# Altium PCB PCB1.PcbDoc (part 2 of 2)
Units mm, origin at the board's own origin, x right, y up, seen from the top; angles counter-clockwise.
Board outline 150 x 80 mm, 2 copper layers (Top Layer, Bottom Layer), stack 1.571 mm thick; 176 components, 104 nets, 518 pads, 47 vias.
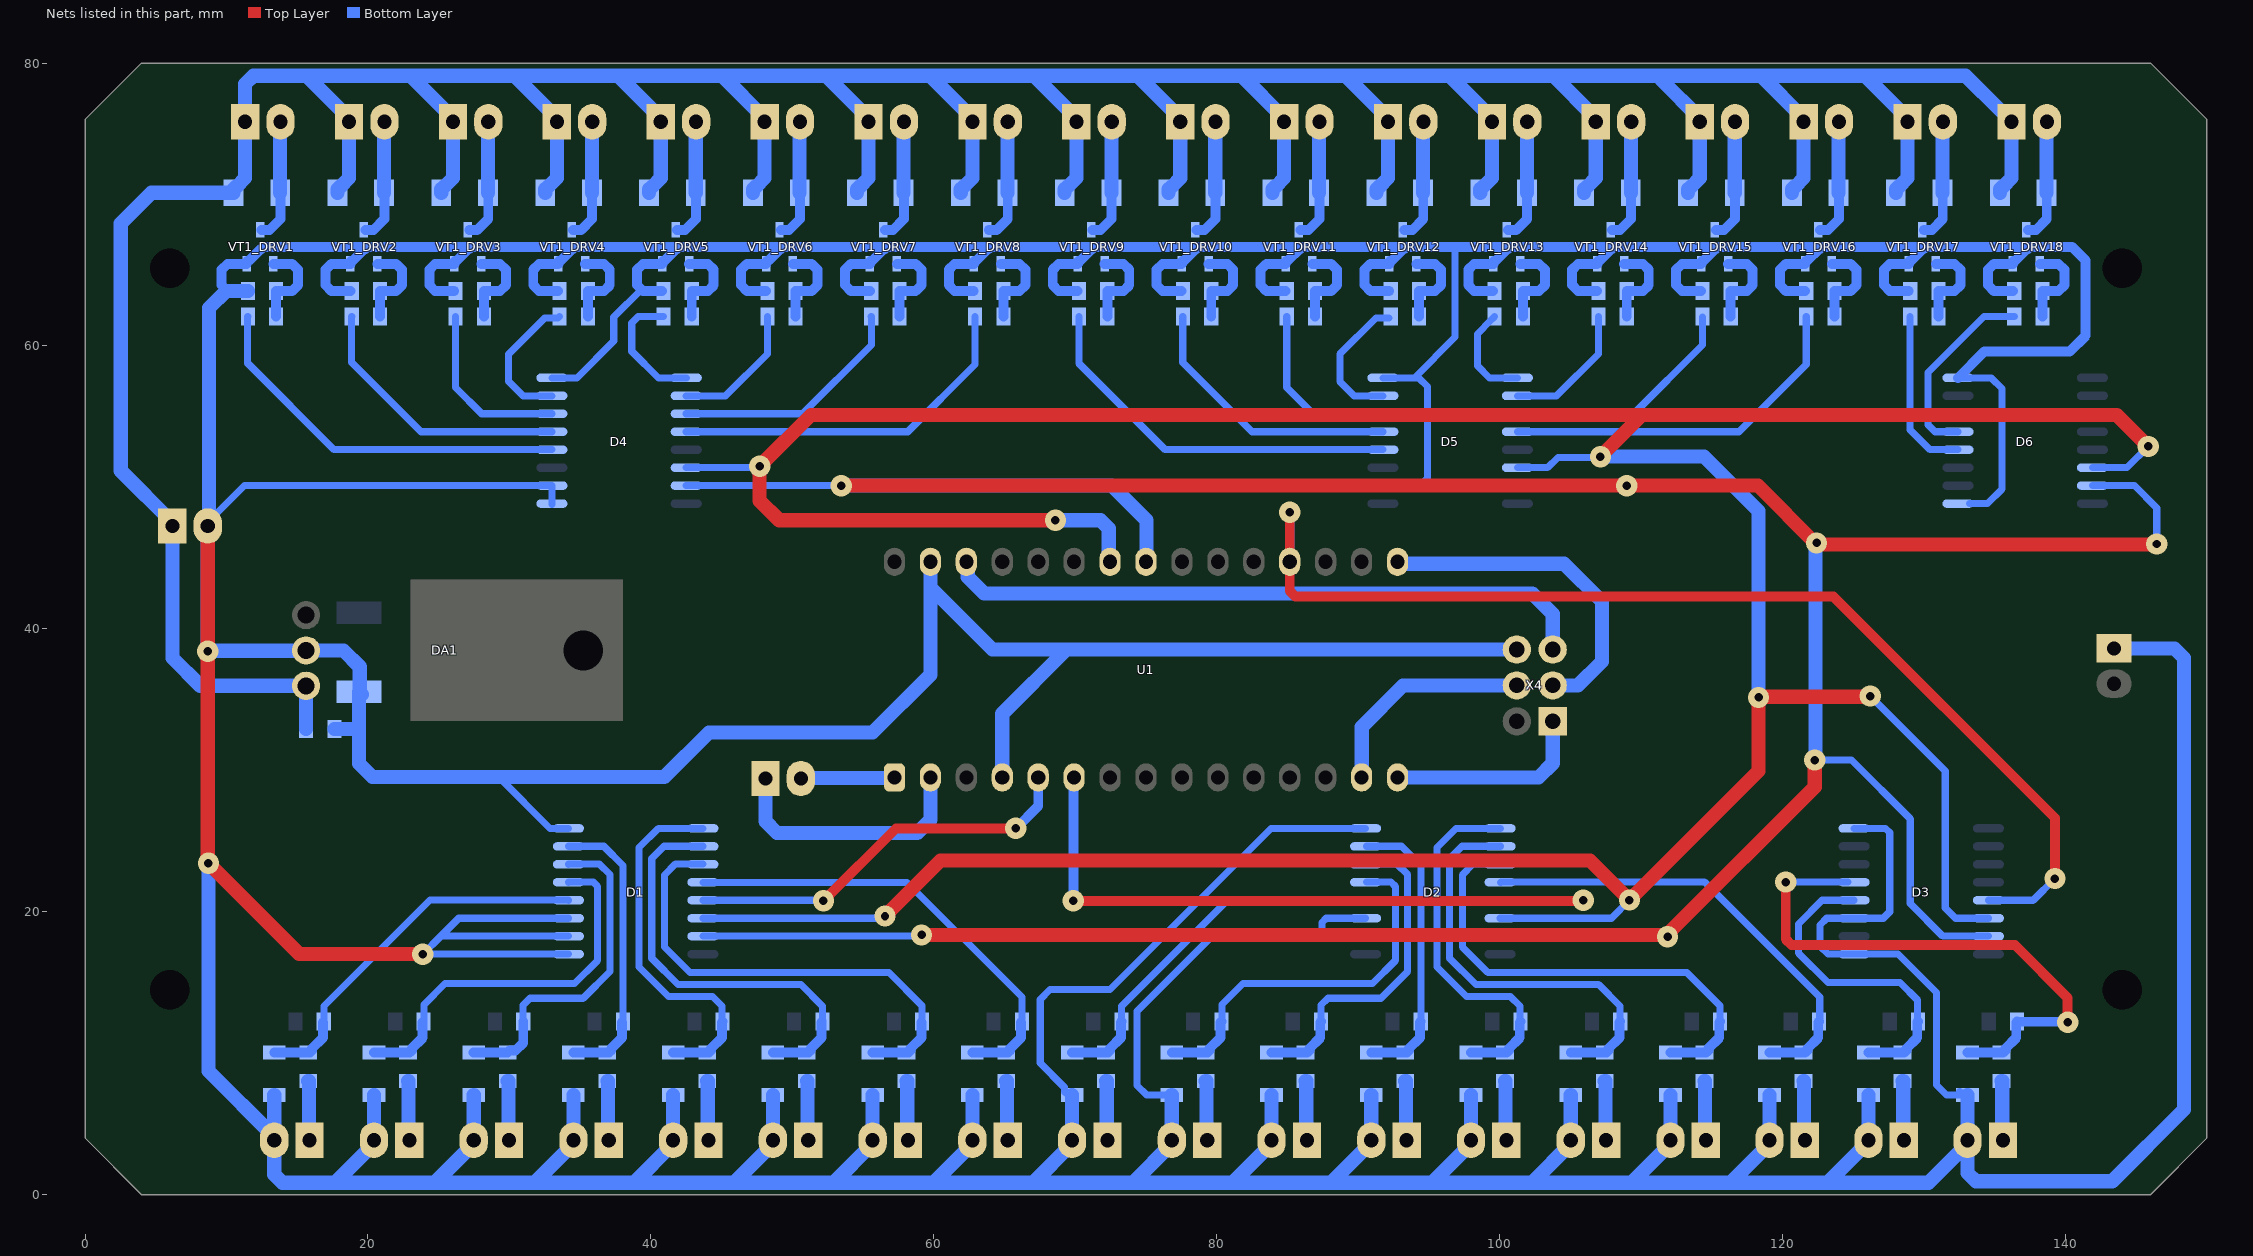
[diagram p2: the nets of this part, all layers, seen from the top]

## Via types
v1: diameter 1.5, hole 0.6, Top Layer to Bottom Layer, 47 vias

## Nets (pads, with @x,y where several pads share a name; then routed paths per layer and width w, separated by ;. In a path a pad name is that pad's centre, name@x,y a point inside that pad or via, vN(x,y) a via of type N, cw(c..) or ccw(c..) an arc to the next point about the centre after c; other vN are vias at no path point) (continued)
+12В: C1.2 DA1.1 VD1_DRV1.2 VD1_DRV2.2 VD1_DRV3.2 VD1_DRV4.2 VD1_DRV5.2 VD1_DRV6.2 VD1_DRV7.2 VD1_DRV8.2 VD1_DRV9.2 VD1_DRV10.2 VD1_DRV11.2 VD1_DRV12.2 VD1_DRV13.2 VD1_DRV14.2 VD1_DRV15.2 VD1_DRV16.2 VD1_DRV17.2 VD1_DRV18.2 X1.1 X1_DRV1.1 X1_DRV2.1 X1_DRV3.1 X1_DRV4.1 X1_DRV5.1 X1_DRV6.1 X1_DRV7.1 X1_DRV8.1 X1_DRV9.1 X1_DRV10.1 X1_DRV11.1 X1_DRV12.1 X1_DRV13.1 X1_DRV14.1 X1_DRV15.1 X1_DRV16.1 X1_DRV17.1 X1_DRV18.1 | length 352.4
  Bottom Layer w1: C1.2@15.625,32.925 DA1.1@15.625,35.975 8.15,35.975 6.175,37.95 X1.1@6.175,47.275 6.175,47.525 2.525,51.175 2.525,68.65 4.704,70.829 VD1_DRV1.2@10.495,70.829 10.495,71.079 10.695,71.279 10.735,71.279 11.32,71.865 X1_DRV1.1@11.32,75.85 11.32,78.514 11.906,79.1 15.665,79.1 ; VD1_DRV2.2@17.84,70.829 17.84,71.079 18.04,71.279 18.079,71.279 18.665,71.865 X1_DRV2.1@18.665,75.85 18.665,76.1 15.665,79.1 ; VD1_DRV3.2@25.184,70.829 25.184,71.079 25.384,71.279 25.423,71.279 26.009,71.865 X1_DRV3.1@26.009,75.85 26.009,76.1 23.009,79.1 ; VD1_DRV4.2@32.529,70.829 32.529,71.079 32.729,71.279 32.768,71.279 33.354,71.865 X1_DRV4.1@33.354,75.85 33.354,76.1 30.354,79.1 ; VD1_DRV5.2@39.873,70.829 39.873,71.079 40.073,71.279 40.112,71.279 40.698,71.865 X1_DRV5.1@40.698,75.85 40.698,76.1 37.698,79.1 ; VD1_DRV6.2@47.217,70.829 47.217,71.079 47.417,71.279 47.457,71.279 48.042,71.865 X1_DRV6.1@48.042,75.85 48.042,76.1 45.042,79.1 ; VD1_DRV7.2@54.562,70.829 54.562,71.079 54.762,71.279 54.801,71.279 55.387,71.865 X1_DRV7.1@55.387,75.85 55.387,76.1 52.387,79.1 ; VD1_DRV8.2@61.906,70.829 61.906,71.079 62.106,71.279 62.145,71.279 62.731,71.865 X1_DRV8.1@62.731,75.85 62.731,76.1 59.731,79.1 ; VD1_DRV9.2@69.251,70.829 69.251,71.079 69.451,71.279 69.49,71.279 70.076,71.865 X1_DRV9.1@70.076,75.85 70.076,76.1 67.076,79.1 ; VD1_DRV10.2@76.595,70.829 76.595,71.079 76.795,71.279 76.834,71.279 77.42,71.865 X1_DRV10.1@77.42,75.85 77.42,76.1 74.42,79.1 ; VD1_DRV11.2@83.939,70.829 83.939,71.079 84.139,71.279 84.179,71.279 84.764,71.865 X1_DRV11.1@84.764,75.85 84.764,76.1 81.764,79.1 ; VD1_DRV12.2@91.284,70.829 91.284,71.079 91.484,71.279 91.523,71.279 92.109,71.865 X1_DRV12.1@92.109,75.85 92.109,76.1 89.109,79.1 ; VD1_DRV13.2@98.628,70.829 98.628,71.079 98.828,71.279 98.867,71.279 99.453,71.865 X1_DRV13.1@99.453,75.85 99.453,76.1 96.453,79.1 ; VD1_DRV14.2@105.973,70.829 105.973,71.079 106.173,71.279 106.212,71.279 106.798,71.865 X1_DRV14.1@106.798,75.85 106.798,76.1 103.798,79.1 ; VD1_DRV15.2@113.317,70.829 113.317,71.079 113.517,71.279 113.556,71.279 114.142,71.865 X1_DRV15.1@114.142,75.85 114.142,76.1 111.45,78.792 111.45,79.1 ; VD1_DRV16.2@120.661,70.829 120.661,71.079 120.861,71.279 120.901,71.279 121.486,71.865 X1_DRV16.1@121.486,75.85 ; X1_DRV16.1@121.486,75.85 121.486,76.1 118.486,79.1 ; VD1_DRV17.2@128.006,70.829 128.006,71.079 128.206,71.279 128.245,71.279 128.831,71.865 X1_DRV17.1@128.831,75.85 128.831,76.1 125.831,79.1 ; VD1_DRV18.2@135.359,70.829 135.359,71.079 135.559,71.279 135.598,71.279 136.184,71.865 X1_DRV18.1@136.184,75.85 136.184,76.1 135.684,76.6 135.434,76.6 132.934,79.1 125.831,79.1 ; 15.665,79.1 23.009,79.1 ; 23.009,79.1 30.354,79.1 ; 30.354,79.1 37.698,79.1 ; 37.698,79.1 45.042,79.1 ; 45.042,79.1 52.387,79.1 ; 52.387,79.1 59.731,79.1 ; 59.731,79.1 67.076,79.1 ; 67.076,79.1 74.42,79.1 ; 74.42,79.1 81.764,79.1 ; 81.764,79.1 89.109,79.1 ; 89.109,79.1 96.453,79.1 ; 96.453,79.1 103.798,79.1 ; 103.798,79.1 111.45,79.1 ; 111.45,79.1 118.486,79.1 ; 118.486,79.1 125.831,79.1
GND: C1.1 C1_INPUTER1.1 C1_INPUTER2.1 C1_INPUTER3.1 C1_INPUTER4.1 C1_INPUTER5.1 C1_INPUTER6.1 C1_INPUTER7.1 C1_INPUTER8.1 C1_INPUTER9.1 C1_INPUTER10.1 C1_INPUTER11.1 C1_INPUTER12.1 C1_INPUTER13.1 C1_INPUTER14.1 C1_INPUTER15.1 C1_INPUTER16.1 C1_INPUTER17.1 C1_INPUTER18.1 C2.2 D1.1 D1.2 D1.3 D1.8 D2.2 D2.3 D2.8 D3.1 D3.3 D3.8 D4.1 D4.2 D4.8 D5.2 D5.8 D6.1 D6.8 DA1.2 R2_DRV1.2 R2_DRV2.2 R2_DRV3.2 R2_DRV4.2 R2_DRV5.2 R2_DRV6.2 R2_DRV7.2 R2_DRV8.2 R2_DRV9.2 R2_DRV10.2 R2_DRV11.2 R2_DRV12.2 R2_DRV13.2 R2_DRV14.2 R2_DRV15.2 R2_DRV16.2 R2_DRV17.2 R2_DRV18.2 U1.4 U1.29 VT1_DRV1.2 VT1_DRV2.2 VT1_DRV3.2 VT1_DRV4.2 VT1_DRV5.2 VT1_DRV6.2 VT1_DRV7.2 VT1_DRV8.2 VT1_DRV9.2 VT1_DRV10.2 VT1_DRV11.2 VT1_DRV12.2 VT1_DRV13.2 VT1_DRV14.2 VT1_DRV15.2 VT1_DRV16.2 VT1_DRV17.2 VT1_DRV18.2 X1.2 X1_INPUTER1.2 X1_INPUTER2.2 X1_INPUTER3.2 X1_INPUTER4.2 X1_INPUTER5.2 X1_INPUTER6.2 X1_INPUTER7.2 X1_INPUTER8.2 X1_INPUTER9.2 X1_INPUTER10.2 X1_INPUTER11.2 X1_INPUTER12.2 X1_INPUTER13.2 X1_INPUTER14.2 X1_INPUTER15.2 X1_INPUTER16.2 X1_INPUTER17.2 X1_INPUTER18.2 X2.1 X4.6 | length 998.8
  Top Layer w1: v1@8.675,23.425 v1(8.675,38.425) X1.2@8.675,47.275 ; v1(8.723,23.431) 15.149,17.005 v1(23.88,17.005)
  Bottom Layer w0.5: X1.2@8.675,47.275 8.675,47.525 8.775,47.625 11.275,50.125 D4.2@33,50.125 D4.1@33,48.855 D4.1@33,48.809 ; 29.3,29.475 32.88,25.895 D1.8@34.175,25.895 ; D4.8@33,57.745 34.77,57.745 37.375,60.35 37.375,62.043 39.33,63.998 ; D1.1@34.175,17.005 v1(23.88,17.005) 25.15,18.275 ; D1.2@34.175,18.275 25.15,18.275 ; D1.3@34.175,19.545 26.42,19.545 25.15,18.275 ; C1_INPUTER9.1@69.775,7.05 69.475,7.05 69.225,7.3 69.225,7.6 67.525,9.3 67.525,13.8 68.225,14.5 72.45,14.5 83.845,25.895 D2.8@90.525,25.895 ; C1_INPUTER10.1@76.825,7.05 75.05,7.05 74.375,7.725 74.375,12.975 79.675,18.275 87.739,18.275 ; D2.2@90.525,18.275 87.739,18.275 ; D2.3@90.525,19.545 87.739,19.545 87.446,19.252 87.446,18.568 87.739,18.275 ; D5.2@91.75,50.125 94.35,50.125 94.9,50.675 94.9,57.125 94.28,57.745 93.97,57.745 ; D5.8@91.75,57.745 93.97,57.745 ; 97.081,67 96.85,66.769 96.85,60.625 93.97,57.745 ; D3.8@125.05,25.895 127.282,25.895 127.575,25.602 127.575,20 127.12,19.545 D3.3@125.05,19.545 123.12,19.545 122.65,19.075 122.65,17.568 123.2,17.018 125.037,17.018 D3.1@125.05,17.005 128.17,17.005 130.875,14.3 130.875,7.75 131.575,7.05 C1_INPUTER18.1@132.775,7.05 ; D6.8@132.4,57.745 134.755,57.745 135.5,57 135.5,49.874 134.481,48.855 D6.1@133.227,48.855 ; C1_INPUTER18.1@132.525,7.3 C1_INPUTER18.1@132.775,7.05 ; C1_INPUTER18.1@133.075,7.05 C1_INPUTER18.1@132.775,7.05
  Bottom Layer w0.7: 10.06,63.89 9.65,64.3 9.65,65.39 10.06,65.8 VT1_DRV1.2@11.42,65.8 11.47,65.85 11.47,66 11.57,66 12.42,66.85 12.47,66.85 12.62,67 19.965,67 ; R2_DRV2.2@18.612,63.882 R2_DRV2.2@18.754,63.882 ; R2_DRV2.2@18.704,63.89 17.405,63.89 16.995,64.3 16.995,65.39 17.405,65.8 VT1_DRV2.2@18.765,65.8 18.815,65.85 18.815,66 18.915,66 19.765,66.85 19.815,66.85 19.965,67 ; R2_DRV3.2@25.957,63.882 R2_DRV3.2@26.099,63.882 ; R2_DRV3.2@26.049,63.89 24.749,63.89 24.339,64.3 24.339,65.39 24.749,65.8 VT1_DRV3.2@26.109,65.8 26.159,65.85 26.159,66 26.259,66 27.109,66.85 27.159,66.85 27.309,67 ; R2_DRV4.2@33.301,63.882 R2_DRV4.2@33.443,63.882 ; R2_DRV4.2@33.393,63.89 32.094,63.89 31.684,64.3 31.684,65.39 32.094,65.8 VT1_DRV4.2@33.454,65.8 33.504,65.85 33.504,66 33.604,66 34.454,66.85 34.504,66.85 34.654,67 ; R2_DRV5.2@40.646,63.882 R2_DRV5.2@40.788,63.882 ; R2_DRV5.2@40.738,63.89 39.438,63.89 39.33,63.998 39.028,64.3 39.028,65.39 39.438,65.8 VT1_DRV5.2@40.798,65.8 40.848,65.85 40.848,66 40.948,66 41.798,66.85 41.848,66.85 41.998,67 ; R2_DRV6.2@47.99,63.882 R2_DRV6.2@48.132,63.882 ; R2_DRV6.2@48.082,63.89 46.782,63.89 46.372,64.3 46.372,65.39 46.782,65.8 VT1_DRV6.2@48.142,65.8 48.192,65.85 48.192,66 48.292,66 49.142,66.85 49.192,66.85 49.342,67 ; R2_DRV7.2@55.334,63.882 R2_DRV7.2@55.476,63.882 ; R2_DRV7.2@55.426,63.89 54.127,63.89 53.717,64.3 53.717,65.39 54.127,65.8 VT1_DRV7.2@55.487,65.8 55.537,65.85 55.537,66 55.637,66 56.487,66.85 56.537,66.85 56.687,67 ; R2_DRV8.2@62.679,63.882 R2_DRV8.2@62.821,63.882 ; R2_DRV8.2@62.771,63.89 61.471,63.89 61.061,64.3 61.061,65.39 61.471,65.8 VT1_DRV8.2@62.831,65.8 62.881,65.85 62.881,66 62.981,66 63.831,66.85 63.881,66.85 64.031,67 ; R2_DRV9.2@70.023,63.882 R2_DRV9.2@70.165,63.882 ; R2_DRV9.2@70.115,63.89 68.816,63.89 68.406,64.3 68.406,65.39 68.816,65.8 VT1_DRV9.2@70.176,65.8 70.226,65.85 70.226,66 70.326,66 71.176,66.85 71.226,66.85 71.376,67 ; R2_DRV10.2@77.368,63.882 R2_DRV10.2@77.51,63.882 ; R2_DRV10.2@77.46,63.89 76.16,63.89 75.75,64.3 75.75,65.39 76.16,65.8 VT1_DRV10.2@77.52,65.8 77.57,65.85 77.57,66 77.67,66 78.52,66.85 78.57,66.85 78.72,67 ; R2_DRV11.2@84.712,63.882 R2_DRV11.2@84.854,63.882 ; R2_DRV11.2@84.804,63.89 83.504,63.89 83.094,64.3 83.094,65.39 83.504,65.8 VT1_DRV11.2@84.864,65.8 84.914,65.85 84.914,66 85.014,66 85.864,66.85 85.914,66.85 86.064,67 ; R2_DRV12.2@92.056,63.882 R2_DRV12.2@92.198,63.882 ; R2_DRV12.2@92.148,63.89 90.849,63.89 90.439,64.3 90.439,65.39 90.849,65.8 VT1_DRV12.2@92.209,65.8 92.259,65.85 92.259,66 92.359,66 93.209,66.85 93.259,66.85 93.409,67 ; R2_DRV13.2@99.401,63.882 R2_DRV13.2@99.543,63.882 ; R2_DRV13.2@99.493,63.89 98.193,63.89 97.783,64.3 97.783,65.39 98.193,65.8 VT1_DRV13.2@99.553,65.8 99.603,65.85 99.603,66 99.703,66 100.553,66.85 100.603,66.85 100.753,67 ; R2_DRV14.2@106.745,63.882 R2_DRV14.2@106.887,63.882 ; R2_DRV14.2@106.837,63.89 105.538,63.89 105.128,64.3 105.128,65.39 105.538,65.8 VT1_DRV14.2@106.898,65.8 106.948,65.85 106.948,66 107.048,66 107.898,66.85 107.948,66.85 108.098,67 ; R2_DRV15.2@114.09,63.882 R2_DRV15.2@114.232,63.882 ; R2_DRV15.2@114.182,63.89 112.882,63.89 112.472,64.3 112.472,65.39 112.882,65.8 VT1_DRV15.2@114.242,65.8 114.292,65.85 114.292,66 114.392,66 115.242,66.85 115.292,66.85 115.442,67 ; R2_DRV16.2@121.434,63.882 R2_DRV16.2@121.576,63.882 ; R2_DRV16.2@121.526,63.89 120.226,63.89 119.816,64.3 119.816,65.39 120.226,65.8 VT1_DRV16.2@121.586,65.8 121.636,65.85 121.636,66 121.736,66 122.586,66.85 122.636,66.85 122.786,67 ; R2_DRV17.2@128.778,63.882 R2_DRV17.2@128.92,63.882 ; R2_DRV17.2@128.87,63.89 127.571,63.89 127.161,64.3 127.161,65.39 127.571,65.8 VT1_DRV17.2@128.931,65.8 128.981,65.85 128.981,66 129.081,66 129.931,66.85 129.981,66.85 130.131,67 ; D6.8@132.4,57.745 134.255,59.6 140.3,59.6 141.425,60.725 141.425,66.05 140.475,67 137.484,67 ; R2_DRV18.2@136.131,63.882 R2_DRV18.2@136.273,63.882 ; R2_DRV18.2@136.223,63.89 134.924,63.89 134.514,64.3 134.514,65.39 134.924,65.8 VT1_DRV18.2@136.284,65.8 136.334,65.85 136.334,66 136.434,66 137.284,66.85 137.334,66.85 137.484,67 ; 19.965,67 27.309,67 ; 27.309,67 34.654,67 ; 34.654,67 41.998,67 ; 41.998,67 49.342,67 ; 49.342,67 56.687,67 ; 56.687,67 64.031,67 ; 64.031,67 71.376,67 ; 71.376,67 78.72,67 ; 78.72,67 86.064,67 ; 86.064,67 93.409,67 ; 93.409,67 97.081,67 100.753,67 ; 100.753,67 108.098,67 ; 108.098,67 115.442,67 ; 115.442,67 122.786,67 ; 122.786,67 130.131,67 ; 130.131,67 137.484,67
  Bottom Layer w1: v1(8.723,23.431) 8.723,8.752 X1_INPUTER1.2@13.375,4.1 ; R2_DRV1.2@11.268,63.882 9.982,63.882 8.775,62.675 8.775,47.625 8.775,47.375 X1.2@8.675,47.275 v1(8.675,38.425) 8.7,38.45 15.6,38.45 DA1.2@15.625,38.475 18.275,38.475 19.425,37.325 19.425,35.6 C2.2@19.375,35.55 ; R2_DRV1.2@11.41,63.882 R2_DRV1.2@11.51,63.882 ; C1_INPUTER1.1@13.375,7.05 X1_INPUTER1.2@13.375,4.1 ; C1.1@17.625,32.925 19.375,32.925 ; C2.2@19.575,35.35 C2.2@19.375,35.55 ; C1_INPUTER2.1@20.425,7.05 X1_INPUTER2.2@20.425,3.85 20.425,3.6 17.675,0.85 ; C1_INPUTER3.1@27.475,7.05 X1_INPUTER3.2@27.475,3.85 27.475,3.6 24.725,0.85 ; C1_INPUTER4.1@34.525,7.05 X1_INPUTER4.2@34.525,3.85 34.525,3.6 31.775,0.85 ; C1_INPUTER5.1@41.575,7.05 X1_INPUTER5.2@41.575,3.85 41.575,3.6 38.825,0.85 ; C1_INPUTER6.1@48.625,7.05 X1_INPUTER6.2@48.625,3.85 48.625,3.6 45.875,0.85 ; C1_INPUTER7.1@55.675,7.05 X1_INPUTER7.2@55.675,3.85 55.675,3.6 52.925,0.85 ; U1.29@59.76,44.74 59.76,42.935 ; C1_INPUTER8.1@62.725,7.05 X1_INPUTER8.2@62.725,3.85 62.725,3.6 59.975,0.85 ; U1.4@64.84,29.5 64.84,34.005 69.375,38.54 ; C1_INPUTER9.1@69.775,7.05 X1_INPUTER9.2@69.775,3.85 69.775,3.6 67.025,0.85 ; C1_INPUTER10.1@76.825,7.05 X1_INPUTER10.2@76.825,3.85 76.825,3.6 74.075,0.85 ; C1_INPUTER11.1@83.875,7.05 X1_INPUTER11.2@83.875,3.85 83.875,3.6 81.125,0.85 ; C1_INPUTER12.1@90.925,7.05 X1_INPUTER12.2@90.925,3.85 90.925,3.7 88.075,0.85 ; C1_INPUTER13.1@97.975,7.05 X1_INPUTER13.2@97.975,3.85 97.975,3.6 95.225,0.85 ; X4.6@101.21,38.54 69.375,38.54 ; C1_INPUTER14.1@105.025,7.05 X1_INPUTER14.2@105.025,3.85 105.025,3.6 102.275,0.85 ; C1_INPUTER15.1@112.075,7.05 X1_INPUTER15.2@112.075,3.85 112.075,3.6 109.325,0.85 ; C1_INPUTER16.1@119.075,7.05 X1_INPUTER16.2@119.075,3.85 119.075,3.6 116.325,0.85 ; C1_INPUTER17.1@126.075,7.05 X1_INPUTER17.2@126.075,3.85 126.075,3.75 123.175,0.85 ; C1_INPUTER18.1@133.075,7.05 X1_INPUTER18.2@133.075,3.85 X1_INPUTER18.2@133.075,3.6 ; X2.1@143.425,38.625 147.7,38.625 148.375,37.95 148.375,6.025 143.3,0.95 133.661,0.95 133.075,1.536 X1_INPUTER18.2@133.075,3.6 ; X1_INPUTER1.2@13.375,4.1 X1_INPUTER1.2@13.375,3.85 13.375,1.436 13.961,0.85 17.675,0.85 ; 17.675,0.85 24.725,0.85 ; 19.375,32.925 C2.2@19.375,35.55 ; 19.375,32.925 19.375,30.475 20.325,29.525 40.95,29.525 44.1,32.675 55.675,32.675 59.76,36.76 59.76,42.935 ; 24.725,0.85 31.775,0.85 ; 31.775,0.85 38.825,0.85 ; 38.825,0.85 45.875,0.85 ; 45.875,0.85 52.925,0.85 ; 52.925,0.85 59.975,0.85 ; 59.76,42.935 64.155,38.54 69.375,38.54 ; 59.975,0.85 67.025,0.85 ; 67.025,0.85 74.075,0.85 ; 74.075,0.85 81.125,0.85 ; 81.125,0.85 88.075,0.85 ; 88.075,0.85 95.225,0.85 ; 95.225,0.85 102.275,0.85 ; 102.275,0.85 109.325,0.85 ; 109.325,0.85 116.325,0.85 ; 116.325,0.85 123.175,0.85 ; 123.175,0.85 130.325,0.85 X1_INPUTER18.2@133.075,3.6
IN1: C1_INPUTER1.2 D1.4 R1_INPUTER1.2 R2_INPUTER1.1 | length 26.6
  Bottom Layer w0.5: R2_INPUTER1.1@16.82,12.195 R2_INPUTER1.1@16.875,12.25 16.882,12.257 16.882,13.332 24.378,20.828 34.162,20.828 D1.4@34.175,20.815
  Bottom Layer w0.7: C1_INPUTER1.2@13.375,10.05 R1_INPUTER1.2@15.775,10.05 15.9,10.05 16.05,10.2 16.05,10.325 16.82,11.095 R2_INPUTER1.1@16.82,12.195
IN2: C1_INPUTER2.2 D1.5 R1_INPUTER2.2 R2_INPUTER2.1 | length 27.3
  Bottom Layer w0.5: R2_INPUTER2.1@23.87,12.195 R2_INPUTER2.1@23.925,12.25 23.975,12.3 23.975,13.455 25.445,14.925 34.604,14.925 36.223,16.544 36.223,21.803 35.93,22.096 34.186,22.096 D1.5@34.175,22.085
  Bottom Layer w0.7: C1_INPUTER2.2@20.425,10.05 R1_INPUTER2.2@22.825,10.05 22.95,10.05 23.1,10.2 23.1,10.325 23.87,11.095 R2_INPUTER2.1@23.87,12.195
IN3: C1_INPUTER3.2 D1.6 R1_INPUTER3.2 R2_INPUTER3.1 | length 23.6
  Bottom Layer w0.5: R2_INPUTER3.1@30.975,12.25 30.975,13.4 31.465,13.89 35.216,13.89 37.099,15.773 37.099,22.626 36.361,23.364 34.184,23.364 D1.6@34.175,23.355
  Bottom Layer w0.7: C1_INPUTER3.2@27.475,10.05 R1_INPUTER3.2@29.875,10.05 30.025,10.2 30.44,10.2 30.975,10.735 R2_INPUTER3.1@30.975,12.25
IN4: C1_INPUTER4.2 D1.7 R1_INPUTER4.2 R2_INPUTER4.1 | length 20.6
  Bottom Layer w0.5: D1.7@34.175,24.625 34.182,24.632 36.668,24.632 38.025,23.275 R2_INPUTER4.1@38.025,12.25 R2_INPUTER4.1@37.97,12.195
  Bottom Layer w0.7: C1_INPUTER4.2@34.525,10.05 R1_INPUTER4.2@36.925,10.05 37.05,10.05 37.2,10.2 37.2,10.325 37.97,11.095 R2_INPUTER4.1@37.97,12.195
IN5: C1_INPUTER5.2 D1.9 R1_INPUTER5.2 R2_INPUTER5.1 | length 26.7
  Bottom Layer w0.5: D1.9@43.67,25.9 40.525,25.9 39.163,24.538 39.163,16.107 41.256,14.013 44.351,14.013 45.032,13.332 45.032,12.293 R2_INPUTER5.1@45.075,12.25
  Bottom Layer w0.7: C1_INPUTER5.2@41.575,10.05 R1_INPUTER5.2@43.975,10.05 44.1,10.05 44.25,10.2 44.25,10.325 45.02,11.095 45.02,12.195 R2_INPUTER5.1@45.075,12.25
IN6: C1_INPUTER6.2 D1.10 R1_INPUTER6.2 R2_INPUTER6.1 | length 30.7
  Bottom Layer w0.5: D1.10@43.668,24.632 40.932,24.632 40.061,23.761 40.061,16.717 41.926,14.851 50.6,14.851 52.119,13.332 52.119,12.349 52.172,12.297 R2_INPUTER6.1@52.125,12.25 R2_INPUTER6.1@52.07,12.195
  Bottom Layer w0.7: C1_INPUTER6.2@48.625,10.05 R1_INPUTER6.2@51.025,10.05 51.15,10.05 51.3,10.2 51.3,10.325 52.07,11.095 R2_INPUTER6.1@52.07,12.195
IN7: C1_INPUTER7.2 D1.11 R1_INPUTER7.2 R2_INPUTER7.1 | length 34.3
  Bottom Layer w0.5: D1.11@43.675,23.377 41.727,23.377 40.959,22.609 40.959,17.517 42.763,15.714 56.824,15.714 59.175,13.363 R2_INPUTER7.1@59.175,12.25 R2_INPUTER7.1@59.12,12.195
  Bottom Layer w0.7: C1_INPUTER7.2@55.675,10.05 R1_INPUTER7.2@58.075,10.05 58.2,10.05 58.35,10.2 58.35,10.325 59.12,11.095 R2_INPUTER7.1@59.12,12.195
IN8: C1_INPUTER8.2 D1.12 R1_INPUTER8.2 R2_INPUTER8.1 | length 32.8
  Bottom Layer w0.5: D1.12@43.676,22.084 58.114,22.084 66.225,13.972 R2_INPUTER8.1@66.225,12.25 R2_INPUTER8.1@66.17,12.195
  Bottom Layer w0.7: C1_INPUTER8.2@62.725,10.05 R1_INPUTER8.2@65.125,10.05 65.25,10.05 65.4,10.2 65.4,10.325 66.17,11.095 R2_INPUTER8.1@66.17,12.195
IN9: C1_INPUTER9.2 D2.4 R1_INPUTER9.2 R2_INPUTER9.1 | length 26.6
  Bottom Layer w0.5: R2_INPUTER9.1@73.282,12.257 73.282,13.332 80.778,20.828 D2.4@90.562,20.828
  Bottom Layer w0.7: C1_INPUTER9.2@69.775,10.05 72.3,10.05 72.45,10.2 72.45,10.325 73.22,11.095 73.22,12.195 R2_INPUTER9.1@73.275,12.25
IN10: C1_INPUTER10.2 D2.5 R1_INPUTER10.2 R2_INPUTER10.1 | length 27.2
  Bottom Layer w0.5: R2_INPUTER10.1@80.375,12.3 80.375,13.455 81.845,14.925 91.004,14.925 92.623,16.544 92.623,21.803 92.33,22.096 D2.5@90.586,22.096
  Bottom Layer w0.7: C1_INPUTER10.2@76.825,10.05 79.35,10.05 79.5,10.2 79.5,10.325 80.27,11.095 80.27,12.195 R2_INPUTER10.1@80.325,12.25
IN11: C1_INPUTER11.2 D2.6 R1_INPUTER11.2 R2_INPUTER11.1 | length 23.5
  Bottom Layer w0.5: R2_INPUTER11.1@87.375,12.25 87.375,13.4 87.865,13.89 91.616,13.89 93.499,15.773 93.499,22.626 92.761,23.364 D2.6@90.584,23.364
  Bottom Layer w0.7: C1_INPUTER11.2@83.875,10.05 86.4,10.05 86.55,10.2 86.55,10.325 87.32,11.095 87.32,12.195 R2_INPUTER11.1@87.375,12.25
IN12: C1_INPUTER12.2 D2.7 R1_INPUTER12.2 R2_INPUTER12.1 | length 20.6
  Bottom Layer w0.5: D2.7@90.582,24.632 93.068,24.632 94.425,23.275 R2_INPUTER12.1@94.425,12.25
  Bottom Layer w0.7: C1_INPUTER12.2@90.925,10.05 93.45,10.05 93.6,10.2 93.6,10.325 94.37,11.095 94.37,12.195 R2_INPUTER12.1@94.425,12.25
IN13: C1_INPUTER13.2 D2.9 R1_INPUTER13.2 R2_INPUTER13.1 | length 26.7
  Bottom Layer w0.5: D2.9@100.07,25.9 96.925,25.9 95.563,24.538 95.563,16.107 97.656,14.013 100.751,14.013 101.432,13.332 R2_INPUTER13.1@101.432,12.293
  Bottom Layer w0.7: C1_INPUTER13.2@97.975,10.05 100.5,10.05 100.65,10.2 100.65,10.325 101.42,11.095 101.42,12.195 R2_INPUTER13.1@101.475,12.25
IN14: C1_INPUTER14.2 D2.10 R1_INPUTER14.2 R2_INPUTER14.1 | length 30.6
  Bottom Layer w0.5: D2.10@100.068,24.632 97.332,24.632 96.461,23.761 96.461,16.717 98.326,14.851 107,14.851 108.519,13.332 R2_INPUTER14.1@108.519,12.349
  Bottom Layer w0.7: C1_INPUTER14.2@105.025,10.05 107.55,10.05 107.7,10.2 107.7,10.325 108.47,11.095 108.47,12.195 R2_INPUTER14.1@108.525,12.25
IN15: C1_INPUTER15.2 D2.11 R1_INPUTER15.2 R2_INPUTER15.1 | length 34.3
  Bottom Layer w0.5: D2.11@100.075,23.377 98.127,23.377 97.359,22.609 97.359,17.517 99.163,15.714 113.224,15.714 115.575,13.363 R2_INPUTER15.1@115.575,12.25
  Bottom Layer w0.7: C1_INPUTER15.2@112.075,10.05 114.6,10.05 114.75,10.2 114.75,10.325 115.52,11.095 115.52,12.195 R2_INPUTER15.1@115.575,12.25
IN16: C1_INPUTER16.2 D2.12 R1_INPUTER16.2 R2_INPUTER16.1 | length 32.8
  Bottom Layer w0.5: D2.12@100.076,22.084 100.097,22.104 114.493,22.104 122.625,13.972 R2_INPUTER16.1@122.625,12.25
  Bottom Layer w0.7: C1_INPUTER16.2@119.075,10.05 121.6,10.05 121.75,10.2 121.75,10.325 122.52,11.095 122.52,12.195 R2_INPUTER16.1@122.575,12.25
IN17: C1_INPUTER17.2 D3.4 R1_INPUTER17.2 R2_INPUTER17.1 | length 23.1
  Bottom Layer w0.5: D3.4@125.05,20.815 122.79,20.815 121.125,19.15 121.125,17.075 123.2,15 128.3,15 129.55,13.75 129.55,12.225 R2_INPUTER17.1@129.52,12.195
  Bottom Layer w0.7: C1_INPUTER17.2@126.075,10.05 R1_INPUTER17.2@128.475,10.05 128.6,10.05 128.75,10.2 128.75,10.325 129.52,11.095 R2_INPUTER17.1@129.52,12.195 ; R2_INPUTER17.1@129.55,12.225 R2_INPUTER17.1@129.575,12.25
IN18: C1_INPUTER18.2 D3.5 R1_INPUTER18.2 R2_INPUTER18.1 | length 40.5
  Top Layer w0.7: v1(120.225,22.1) 120.225,18.06 120.635,17.65 136.425,17.65 140.15,13.925 v1(140.15,12.2)
  Bottom Layer w0.5: v1(120.225,22.1) D3.5@124.635,22.1
  Bottom Layer w0.7: C1_INPUTER18.2@133.075,10.05 R1_INPUTER18.2@135.475,10.05 135.6,10.05 135.75,10.2 135.75,10.325 136.52,11.095 136.52,12.195 R2_INPUTER18.1@136.575,12.25 136.6,12.225 140.125,12.225 v1(140.15,12.2)
INT0: D1.13 U1.5 | length 28.5
  Top Layer w0.7: v1(52.198,20.781) 57.317,25.9 v1(65.8,25.9)
  Bottom Layer w0.5: D1.13@43.675,20.815 52.11,20.815 v1@52.15,20.775
  Bottom Layer w0.7: v1(65.8,25.9) 67.38,27.48 U1.5@67.38,29.5
INT1: D2.13 U1.6 | length 50.7
  Top Layer w0.7: v1(69.85,20.775) 105.87,20.775 v1(105.91,20.815)
  Bottom Layer w0.5: D2.13@100.025,20.815 v1(105.91,20.815)
  Bottom Layer w0.7: v1(69.85,20.775) 69.885,20.81 69.885,29.465 U1.6@69.92,29.5
INT2: D3.13 U1.19 | length 79.4
  Top Layer w0.7: v1(85.16,48.24) 85.16,42.685 85.57,42.275 123.6,42.275 139.25,26.625 v1(139.25,22.35)
  Bottom Layer w0.5: D3.13@134.55,20.815 137.715,20.815 v1(139.25,22.35)
  Bottom Layer w0.7: U1.19@85.16,44.74 v1(85.16,48.24)
MISO: U1.15 X4.1 | length 14.3
  Bottom Layer w1: U1.15@92.78,29.5 102.75,29.5 103.75,30.5 X4.1@103.75,33.46
MOSI: U1.14 X4.4 | length 15.8
  Bottom Layer w1: U1.14@90.24,29.5 90.248,29.508 90.248,33.073 93.175,36 X4.4@101.21,36
NetR1_DRV1_2: R1_DRV1.2 R2_DRV1.1 VT1_DRV1.1 | length 6.5
  Bottom Layer w0.7: VT1_DRV1.1@13.32,65.8 14.652,65.8 15.062,65.39 15.062,64.292 14.652,63.882 R2_DRV1.1@13.51,63.882 R1_DRV1.2@13.51,62.084
NetR1_DRV2_2: R1_DRV2.2 R2_DRV2.1 VT1_DRV2.1 | length 6.5
  Bottom Layer w0.7: VT1_DRV2.1@20.665,65.8 21.997,65.8 22.407,65.39 22.407,64.292 21.997,63.882 R2_DRV2.1@20.854,63.882 R1_DRV2.2@20.854,62.084
NetR1_DRV3_2: R1_DRV3.2 R2_DRV3.1 VT1_DRV3.1 | length 6.5
  Bottom Layer w0.7: VT1_DRV3.1@28.009,65.8 29.341,65.8 29.751,65.39 29.751,64.292 29.341,63.882 R2_DRV3.1@28.199,63.882 R1_DRV3.2@28.199,62.084
NetR1_DRV4_2: R1_DRV4.2 R2_DRV4.1 VT1_DRV4.1 | length 6.5
  Bottom Layer w0.7: VT1_DRV4.1@35.354,65.8 36.686,65.8 37.096,65.39 37.096,64.292 36.686,63.882 R2_DRV4.1@35.543,63.882 R1_DRV4.2@35.543,62.084
NetR1_DRV5_2: R1_DRV5.2 R2_DRV5.1 VT1_DRV5.1 | length 6.5
  Bottom Layer w0.7: VT1_DRV5.1@42.698,65.8 44.03,65.8 44.44,65.39 44.44,64.292 44.03,63.882 R2_DRV5.1@42.888,63.882 R1_DRV5.2@42.888,62.084
NetR1_DRV6_2: R1_DRV6.2 R2_DRV6.1 VT1_DRV6.1 | length 6.5
  Bottom Layer w0.7: VT1_DRV6.1@50.042,65.8 51.374,65.8 51.784,65.39 51.784,64.292 51.374,63.882 R2_DRV6.1@50.232,63.882 R1_DRV6.2@50.232,62.084
NetR1_DRV7_2: R1_DRV7.2 R2_DRV7.1 VT1_DRV7.1 | length 6.5
  Bottom Layer w0.7: VT1_DRV7.1@57.387,65.8 58.719,65.8 59.129,65.39 59.129,64.292 58.719,63.882 R2_DRV7.1@57.576,63.882 R1_DRV7.2@57.576,62.084
NetR1_DRV8_2: R1_DRV8.2 R2_DRV8.1 VT1_DRV8.1 | length 6.5
  Bottom Layer w0.7: VT1_DRV8.1@64.731,65.8 66.063,65.8 66.473,65.39 66.473,64.292 66.063,63.882 R2_DRV8.1@64.921,63.882 R1_DRV8.2@64.921,62.084
NetR1_DRV9_2: R1_DRV9.2 R2_DRV9.1 VT1_DRV9.1 | length 6.5
  Bottom Layer w0.7: VT1_DRV9.1@72.076,65.8 73.408,65.8 73.818,65.39 73.818,64.292 73.408,63.882 R2_DRV9.1@72.265,63.882 R1_DRV9.2@72.265,62.084
NetR1_DRV10_2: R1_DRV10.2 R2_DRV10.1 VT1_DRV10.1 | length 6.5
  Bottom Layer w0.7: VT1_DRV10.1@79.42,65.8 80.752,65.8 81.162,65.39 81.162,64.292 80.752,63.882 R2_DRV10.1@79.61,63.882 R1_DRV10.2@79.61,62.084
NetR1_DRV11_2: R1_DRV11.2 R2_DRV11.1 VT1_DRV11.1 | length 6.5
  Bottom Layer w0.7: VT1_DRV11.1@86.764,65.8 88.096,65.8 88.506,65.39 88.506,64.292 88.096,63.882 R2_DRV11.1@86.954,63.882 R1_DRV11.2@86.954,62.084
NetR1_DRV12_2: R1_DRV12.2 R2_DRV12.1 VT1_DRV12.1 | length 6.5
  Bottom Layer w0.7: VT1_DRV12.1@94.109,65.8 95.441,65.8 95.851,65.39 95.851,64.292 95.441,63.882 R2_DRV12.1@94.298,63.882 R1_DRV12.2@94.298,62.084
NetR1_DRV13_2: R1_DRV13.2 R2_DRV13.1 VT1_DRV13.1 | length 6.5
  Bottom Layer w0.7: VT1_DRV13.1@101.453,65.8 102.785,65.8 103.195,65.39 103.195,64.292 102.785,63.882 R2_DRV13.1@101.643,63.882 R1_DRV13.2@101.643,62.084
NetR1_DRV14_2: R1_DRV14.2 R2_DRV14.1 VT1_DRV14.1 | length 6.5
  Bottom Layer w0.7: VT1_DRV14.1@108.798,65.8 110.13,65.8 110.54,65.39 110.54,64.292 110.13,63.882 R2_DRV14.1@108.987,63.882 R1_DRV14.2@108.987,62.084
NetR1_DRV15_2: R1_DRV15.2 R2_DRV15.1 VT1_DRV15.1 | length 6.5
  Bottom Layer w0.7: VT1_DRV15.1@116.142,65.8 117.474,65.8 117.884,65.39 117.884,64.292 117.474,63.882 R2_DRV15.1@116.332,63.882 R1_DRV15.2@116.332,62.084
NetR1_DRV16_2: R1_DRV16.2 R2_DRV16.1 VT1_DRV16.1 | length 6.5
  Bottom Layer w0.7: VT1_DRV16.1@123.486,65.8 124.818,65.8 125.228,65.39 125.228,64.292 124.818,63.882 R2_DRV16.1@123.676,63.882 R1_DRV16.2@123.676,62.084
NetR1_DRV17_2: R1_DRV17.2 R2_DRV17.1 VT1_DRV17.1 | length 6.5
  Bottom Layer w0.7: VT1_DRV17.1@130.831,65.8 132.163,65.8 132.573,65.39 132.573,64.292 132.163,63.882 R2_DRV17.1@131.02,63.882 R1_DRV17.2@131.02,62.084
NetR1_DRV18_2: R1_DRV18.2 R2_DRV18.1 VT1_DRV18.1 | length 6.5
  Bottom Layer w0.7: VT1_DRV18.1@138.184,65.8 139.516,65.8 139.926,65.39 139.926,64.292 139.516,63.882 R2_DRV18.1@138.373,63.882 R1_DRV18.2@138.373,62.084
NetR1_INPUTER1_1: R1_INPUTER1.1 X1_INPUTER1.1 | length 4.3
  Bottom Layer w1: R1_INPUTER1.1@15.775,8.05 15.825,8.05 15.825,3.9 X1_INPUTER1.1@15.875,3.85
NetR1_INPUTER2_1: R1_INPUTER2.1 X1_INPUTER2.1 | length 4.3
  Bottom Layer w1: R1_INPUTER2.1@22.825,8.05 22.875,8.05 22.875,3.9 X1_INPUTER2.1@22.925,3.85
NetR1_INPUTER3_1: R1_INPUTER3.1 X1_INPUTER3.1 | length 4.3
  Bottom Layer w1: R1_INPUTER3.1@29.875,8.05 29.925,8.05 29.925,3.9 X1_INPUTER3.1@29.975,3.85
NetR1_INPUTER4_1: R1_INPUTER4.1 X1_INPUTER4.1 | length 4.3
  Bottom Layer w1: R1_INPUTER4.1@36.925,8.05 36.975,8.05 36.975,3.9 X1_INPUTER4.1@37.025,3.85
NetR1_INPUTER5_1: R1_INPUTER5.1 X1_INPUTER5.1 | length 4.3
  Bottom Layer w1: R1_INPUTER5.1@43.975,8.05 44.025,8.05 44.025,3.9 X1_INPUTER5.1@44.075,3.85
NetR1_INPUTER6_1: R1_INPUTER6.1 X1_INPUTER6.1 | length 4.3
  Bottom Layer w1: R1_INPUTER6.1@51.025,8.05 51.075,8.05 51.075,3.9 X1_INPUTER6.1@51.125,3.85
NetR1_INPUTER7_1: R1_INPUTER7.1 X1_INPUTER7.1 | length 4.3
  Bottom Layer w1: R1_INPUTER7.1@58.075,8.05 58.125,8.05 58.125,3.9 X1_INPUTER7.1@58.175,3.85
NetR1_INPUTER8_1: R1_INPUTER8.1 X1_INPUTER8.1 | length 4.3
  Bottom Layer w1: R1_INPUTER8.1@65.125,8.05 65.175,8.05 65.175,3.9 X1_INPUTER8.1@65.225,3.85
NetR1_INPUTER9_1: R1_INPUTER9.1 X1_INPUTER9.1 | length 4.3
  Bottom Layer w1: R1_INPUTER9.1@72.175,8.05 72.225,8.05 72.225,3.9 X1_INPUTER9.1@72.275,3.85
NetR1_INPUTER10_1: R1_INPUTER10.1 X1_INPUTER10.1 | length 4.3
  Bottom Layer w1: R1_INPUTER10.1@79.225,8.05 79.275,8.05 79.275,3.9 X1_INPUTER10.1@79.325,3.85
NetR1_INPUTER11_1: R1_INPUTER11.1 X1_INPUTER11.1 | length 4.3
  Bottom Layer w1: R1_INPUTER11.1@86.275,8.05 86.325,8.05 86.325,3.9 X1_INPUTER11.1@86.375,3.85
NetR1_INPUTER12_1: R1_INPUTER12.1 X1_INPUTER12.1 | length 4.3
  Bottom Layer w1: R1_INPUTER12.1@93.325,8.05 93.375,8.05 93.375,3.9 X1_INPUTER12.1@93.425,3.85
NetR1_INPUTER13_1: R1_INPUTER13.1 X1_INPUTER13.1 | length 4.3
  Bottom Layer w1: R1_INPUTER13.1@100.375,8.05 100.425,8.05 100.425,3.9 X1_INPUTER13.1@100.475,3.85
NetR1_INPUTER14_1: R1_INPUTER14.1 X1_INPUTER14.1 | length 4.3
  Bottom Layer w1: R1_INPUTER14.1@107.425,8.05 107.475,8.05 107.475,3.9 X1_INPUTER14.1@107.525,3.85
NetR1_INPUTER15_1: R1_INPUTER15.1 X1_INPUTER15.1 | length 4.3
  Bottom Layer w1: R1_INPUTER15.1@114.475,8.05 114.525,8.05 114.525,3.9 X1_INPUTER15.1@114.575,3.85
NetR1_INPUTER16_1: R1_INPUTER16.1 X1_INPUTER16.1 | length 4.3
  Bottom Layer w1: R1_INPUTER16.1@121.475,8.05 121.525,8.05 121.525,3.9 X1_INPUTER16.1@121.575,3.85
NetR1_INPUTER17_1: R1_INPUTER17.1 X1_INPUTER17.1 | length 4.3
  Bottom Layer w1: R1_INPUTER17.1@128.475,8.05 128.525,8.05 128.525,3.9 X1_INPUTER17.1@128.575,3.85
NetR1_INPUTER18_1: R1_INPUTER18.1 X1_INPUTER18.1 | length 4.3
  Bottom Layer w1: R1_INPUTER18.1@135.475,8.05 135.525,8.05 135.525,3.9 X1_INPUTER18.1@135.575,3.85
NetVD1_DRV1_1: VD1_DRV1.1 VT1_DRV1.3 X1_DRV1.2 | length 8.6
  Bottom Layer w0.7: VT1_DRV1.3@12.47,68.2 13.041,68.2 13.813,68.972 13.813,70.811 VD1_DRV1.1@13.795,70.829
  Bottom Layer w1: VD1_DRV1.1@13.795,70.829 13.795,75.825 X1_DRV1.2@13.82,75.85
NetVD1_DRV2_1: VD1_DRV2.1 VT1_DRV2.3 X1_DRV2.2 | length 8.6
  Bottom Layer w0.7: VT1_DRV2.3@19.815,68.2 20.385,68.2 21.158,68.972 21.158,70.811 VD1_DRV2.1@21.14,70.829
  Bottom Layer w1: VD1_DRV2.1@21.14,70.829 21.14,75.825 X1_DRV2.2@21.165,75.85
NetVD1_DRV3_1: VD1_DRV3.1 VT1_DRV3.3 X1_DRV3.2 | length 8.6
  Bottom Layer w0.7: VT1_DRV3.3@27.159,68.2 27.73,68.2 28.502,68.972 28.502,70.811 VD1_DRV3.1@28.484,70.829
  Bottom Layer w1: VD1_DRV3.1@28.484,70.829 28.484,75.825 X1_DRV3.2@28.509,75.85
NetVD1_DRV4_1: VD1_DRV4.1 VT1_DRV4.3 X1_DRV4.2 | length 8.6
  Bottom Layer w0.7: VT1_DRV4.3@34.504,68.2 35.074,68.2 35.846,68.972 35.846,70.811 VD1_DRV4.1@35.829,70.829
  Bottom Layer w1: VD1_DRV4.1@35.829,70.829 35.829,75.825 X1_DRV4.2@35.854,75.85
NetVD1_DRV5_1: VD1_DRV5.1 VT1_DRV5.3 X1_DRV5.2 | length 8.6
  Bottom Layer w0.7: VT1_DRV5.3@41.848,68.2 42.418,68.2 43.191,68.972 43.191,70.811 VD1_DRV5.1@43.173,70.829
  Bottom Layer w1: VD1_DRV5.1@43.173,70.829 43.173,75.825 X1_DRV5.2@43.198,75.85
NetVD1_DRV6_1: VD1_DRV6.1 VT1_DRV6.3 X1_DRV6.2 | length 8.6
  Bottom Layer w0.7: VT1_DRV6.3@49.192,68.2 49.763,68.2 50.535,68.972 50.535,70.811 VD1_DRV6.1@50.517,70.829
  Bottom Layer w1: VD1_DRV6.1@50.517,70.829 50.517,75.825 X1_DRV6.2@50.542,75.85
NetVD1_DRV7_1: VD1_DRV7.1 VT1_DRV7.3 X1_DRV7.2 | length 8.6
  Bottom Layer w0.7: VT1_DRV7.3@56.537,68.2 57.107,68.2 57.88,68.972 57.88,70.811 VD1_DRV7.1@57.862,70.829
  Bottom Layer w1: VD1_DRV7.1@57.862,70.829 57.862,75.825 X1_DRV7.2@57.887,75.85
NetVD1_DRV8_1: VD1_DRV8.1 VT1_DRV8.3 X1_DRV8.2 | length 8.6
  Bottom Layer w0.7: VT1_DRV8.3@63.881,68.2 64.452,68.2 65.224,68.972 65.224,70.811 VD1_DRV8.1@65.206,70.829
  Bottom Layer w1: VD1_DRV8.1@65.206,70.829 65.206,75.825 X1_DRV8.2@65.231,75.85
NetVD1_DRV9_1: VD1_DRV9.1 VT1_DRV9.3 X1_DRV9.2 | length 8.6
  Bottom Layer w0.7: VT1_DRV9.3@71.226,68.2 71.796,68.2 72.568,68.972 72.568,70.811 VD1_DRV9.1@72.551,70.829
  Bottom Layer w1: VD1_DRV9.1@72.551,70.829 72.551,75.825 X1_DRV9.2@72.576,75.85
NetVD1_DRV10_1: VD1_DRV10.1 VT1_DRV10.3 X1_DRV10.2 | length 8.6
  Bottom Layer w0.7: VT1_DRV10.3@78.57,68.2 79.14,68.2 79.913,68.972 79.913,70.811 VD1_DRV10.1@79.895,70.829
  Bottom Layer w1: VD1_DRV10.1@79.895,70.829 79.895,75.825 X1_DRV10.2@79.92,75.85
NetVD1_DRV11_1: VD1_DRV11.1 VT1_DRV11.3 X1_DRV11.2 | length 8.6
  Bottom Layer w0.7: VT1_DRV11.3@85.914,68.2 86.485,68.2 87.257,68.972 87.257,70.811 VD1_DRV11.1@87.239,70.829
  Bottom Layer w1: VD1_DRV11.1@87.239,70.829 87.239,75.825 X1_DRV11.2@87.264,75.85
NetVD1_DRV12_1: VD1_DRV12.1 VT1_DRV12.3 X1_DRV12.2 | length 8.6
  Bottom Layer w0.7: VT1_DRV12.3@93.259,68.2 93.829,68.2 94.601,68.972 94.601,70.811 VD1_DRV12.1@94.584,70.829
  Bottom Layer w1: VD1_DRV12.1@94.584,70.829 94.584,75.825 X1_DRV12.2@94.609,75.85
NetVD1_DRV13_1: VD1_DRV13.1 VT1_DRV13.3 X1_DRV13.2 | length 8.6
  Bottom Layer w0.7: VT1_DRV13.3@100.603,68.2 101.174,68.2 101.946,68.972 101.946,70.811 VD1_DRV13.1@101.928,70.829
  Bottom Layer w1: VD1_DRV13.1@101.928,70.829 101.928,75.825 X1_DRV13.2@101.953,75.85
NetVD1_DRV14_1: VD1_DRV14.1 VT1_DRV14.3 X1_DRV14.2 | length 8.6
  Bottom Layer w0.7: VT1_DRV14.3@107.948,68.2 108.518,68.2 109.29,68.972 109.29,70.811 VD1_DRV14.1@109.273,70.829
  Bottom Layer w1: VD1_DRV14.1@109.273,70.829 109.273,75.825 X1_DRV14.2@109.298,75.85
NetVD1_DRV15_1: VD1_DRV15.1 VT1_DRV15.3 X1_DRV15.2 | length 8.6
  Bottom Layer w0.7: VT1_DRV15.3@115.292,68.2 115.862,68.2 116.635,68.972 116.635,70.811 VD1_DRV15.1@116.617,70.829
  Bottom Layer w1: VD1_DRV15.1@116.617,70.829 116.617,75.825 X1_DRV15.2@116.642,75.85
NetVD1_DRV16_1: VD1_DRV16.1 VT1_DRV16.3 X1_DRV16.2 | length 8.6
  Bottom Layer w0.7: VT1_DRV16.3@122.636,68.2 123.207,68.2 123.979,68.972 123.979,70.811 VD1_DRV16.1@123.961,70.829
  Bottom Layer w1: VD1_DRV16.1@123.961,70.829 123.961,75.825 X1_DRV16.2@123.986,75.85
NetVD1_DRV17_1: VD1_DRV17.1 VT1_DRV17.3 X1_DRV17.2 | length 8.6
  Bottom Layer w0.7: VT1_DRV17.3@129.981,68.2 130.551,68.2 131.323,68.972 131.323,70.811 VD1_DRV17.1@131.306,70.829
  Bottom Layer w1: VD1_DRV17.1@131.306,70.829 131.306,75.825 X1_DRV17.2@131.331,75.85
NetVD1_DRV18_1: VD1_DRV18.1 VT1_DRV18.3 X1_DRV18.2 | length 8.6
  Bottom Layer w0.7: VT1_DRV18.3@137.334,68.2 137.904,68.2 138.676,68.972 138.676,70.811 VD1_DRV18.1@138.659,70.829
  Bottom Layer w1: VD1_DRV18.1@138.659,70.829 138.659,75.825 X1_DRV18.2@138.684,75.85
OUT1: D4.4 R1_DRV1.1 | length 27.3
  Bottom Layer w0.5: R1_DRV1.1@11.51,62.084 11.5,62.074 11.5,58.775 17.61,52.665 D4.4@33,52.665
OUT2: D4.5 R1_DRV2.1 | length 19.4
  Bottom Layer w0.5: R1_DRV2.1@18.854,62.084 18.85,62.08 18.85,58.825 23.74,53.935 D4.5@33,53.935
OUT3: D4.6 R1_DRV3.1 | length 12.6
  Bottom Layer w0.5: R1_DRV3.1@26.199,62.084 26.199,57.051 28.045,55.205 D4.6@33,55.205
OUT4: D4.7 R1_DRV4.1 | length 10.1
  Bottom Layer w0.5: D4.7@33,56.475 30.95,56.475 29.95,57.475 29.95,59.425 32.5,61.975 33.434,61.975 R1_DRV4.1@33.543,62.084
OUT5: D4.9 R1_DRV5.1 | length 9.1
  Bottom Layer w0.5: R1_DRV5.1@40.888,62.084 39.109,62.084 38.65,61.625 38.65,59.625 40.53,57.745 D4.9@42.5,57.745
OUT6: D4.10 R1_DRV6.1 | length 9.6
  Bottom Layer w0.5: D4.10@42.5,56.475 45.275,56.475 48.232,59.432 R1_DRV6.1@48.232,62.084
OUT7: D4.11 R1_DRV7.1 | length 17.1
  Bottom Layer w0.5: D4.11@42.5,55.205 50.73,55.205 55.6,60.075 55.6,62.061 R1_DRV7.1@55.576,62.084
OUT8: D4.12 R1_DRV8.1 | length 25.8
  Bottom Layer w0.5: D4.12@42.5,53.935 58.16,53.935 62.921,58.696 R1_DRV8.1@62.921,62.084
OUT9: D5.4 R1_DRV9.1 | length 27.3
  Bottom Layer w0.5: R1_DRV9.1@70.25,62.074 70.25,58.775 76.36,52.665 D5.4@91.75,52.665
OUT10: D5.5 R1_DRV10.1 | length 19.4
  Bottom Layer w0.5: R1_DRV10.1@77.6,62.08 77.6,58.825 82.49,53.935 D5.5@91.75,53.935
OUT11: D5.6 R1_DRV11.1 | length 12.6
  Bottom Layer w0.5: R1_DRV11.1@84.949,62.084 84.949,57.051 86.795,55.205 D5.6@91.75,55.205
OUT12: D5.7 R1_DRV12.1 | length 10
  Bottom Layer w0.5: D5.7@91.75,56.475 89.7,56.475 88.7,57.475 88.7,59.425 91.25,61.975 R1_DRV12.1@92.184,61.975
OUT13: D5.9 R1_DRV13.1 | length 7.2
  Bottom Layer w0.5: R1_DRV13.1@99.638,62.084 99.638,62.068 99.515,61.946 99.393,61.824 98.425,60.856 98.425,58.6 99.28,57.745 D5.9@101.25,57.745
OUT14: D5.10 R1_DRV14.1 | length 9.6
  Bottom Layer w0.5: D5.10@101.25,56.475 104.025,56.475 106.982,59.432 R1_DRV14.1@106.982,62.084
OUT15: D5.11 R1_DRV15.1 | length 17.1
  Bottom Layer w0.5: D5.11@101.25,55.205 109.48,55.205 114.35,60.075 R1_DRV15.1@114.35,62.061
OUT16: D5.12 R1_DRV16.1 | length 25.8
  Bottom Layer w0.5: D5.12@101.25,53.935 116.91,53.935 121.671,58.696 R1_DRV16.1@121.671,62.084
OUT17: D6.4 R1_DRV17.1 | length 12
  Bottom Layer w0.5: R1_DRV17.1@129.02,62.084 129.02,54.055 130.41,52.665 D6.4@132.4,52.665
OUT18: D6.5 R1_DRV18.1 | length 13.8
  Bottom Layer w0.5: D6.5@132.4,53.935 130.765,53.935 130.275,54.425 130.275,58.125 134.234,62.084 R1_DRV18.1@136.373,62.084
RESET: U1.28 X4.5 | length 46.1
  Bottom Layer w1: U1.28@62.3,44.74 62.396,44.644 62.396,43.668 63.564,42.5 102.3,42.5 103.75,41.05 X4.5@103.75,38.54
RX: U1.1 X3.2 | length 6.7
  Bottom Layer w1: X3.2@50.6,29.425 50.638,29.463 57.183,29.463 U1.1@57.22,29.5
SCK: U1.16 X4.3 | length 24
  Bottom Layer w1: U1.16@92.78,44.74 92.92,44.6 104.55,44.6 107.225,41.925 107.225,37.7 105.525,36 X4.3@103.75,36
SCL: D1.14 D2.14 D3.14 D4.14 D5.14 D6.14 U1.24 | length 301.6
  Top Layer w1: v1(56.55,19.7) 60.475,23.625 106.375,23.625 v1(109.175,20.825) 118.3,29.95 v1(118.3,35.15) 118.351,35.201 126.147,35.201 v1(126.198,35.252) ; v1(68.6,47.675) 49.075,47.675 47.691,49.059 v1(47.691,51.493) 51.323,55.125 110.073,55.125 ; v1(107.123,52.175) 110.073,55.125 ; v1(145.85,52.9) 143.625,55.125 110.073,55.125
  Bottom Layer w0.5: D4.14@42.5,51.395 47.593,51.395 v1(47.691,51.493) ; D1.14@43.675,19.545 56.395,19.545 v1(56.55,19.7) ; D2.14@100.025,19.545 107.895,19.545 v1(109.175,20.825) ; D5.14@101.25,51.395 103.395,51.395 104.125,52.125 107.073,52.125 v1(107.123,52.175) ; v1(126.198,35.252) 131.5,29.95 131.5,20.275 132.23,19.545 D3.14@134.55,19.545 ; D6.14@141.9,51.395 144.345,51.395 v1(145.85,52.9)
  Bottom Layer w1: v1(68.6,47.675) 71.779,47.675 72.364,47.089 72.364,44.836 U1.24@72.46,44.74 ; v1(107.123,52.175) 114.45,52.175 118.3,48.325 v1(118.3,35.15)
SDA: D1.15 D2.15 D3.15 D4.15 D5.15 D6.15 U1.23 | length 280.4
  Top Layer w1: v1(53.45,50.125) 108.944,50.125 v1@108.991,50.172 ; v1(59.137,18.363) 111.396,18.363 111.423,18.336 111.776,18.336 v1(111.872,18.24) ; v1(108.991,50.125) 118.25,50.125 122.4,45.975 v1@146.45,45.975 ; v1@111.787,18.336 111.832,18.336 112.122,18.626 112.122,18.671 122.275,28.824 v1(122.275,30.725)
  Bottom Layer w0.5: D4.15@42.5,50.125 v1(53.45,50.125) ; D1.15@43.675,18.275 59.05,18.275 v1(59.137,18.363) ; D2.15@100.025,18.275 111.837,18.275 v1(111.872,18.24) ; D5.15@101.25,50.125 v1(108.991,50.125) ; v1(122.275,30.725) 124.875,30.725 129.025,26.575 129.025,20.575 131.325,18.275 D3.15@134.55,18.275 ; D6.15@141.9,50.125 144.875,50.125 146.45,48.55 v1(146.45,46) v1@146.45,45.55
  Bottom Layer w1: v1(53.45,50.125) 72.575,50.125 75.025,47.675 75.025,44.765 U1.23@75,44.74 ; v1(122.275,30.725) 122.337,30.788 122.337,46.013 v1(122.4,46.075)
TX: U1.2 X3.1 | length 18.4
  Bottom Layer w1: X3.1@48.1,29.425 48.1,26.4 48.925,25.575 58.825,25.575 59.76,26.51 U1.2@59.76,29.5
pads on no net: D1.31 D2.31 D3.6 D3.7 D3.9 D3.10 D3.11 D3.12 D3.31 D4.13 D4.31 D5.13 D5.31 D6.6 D6.7 D6.9 D6.10 D6.11 D6.12 D6.13 D6.31 DA1. DA1.4 U1.3 U1.7 U1.8 U1.9 U1.10 U1.11 U1.12 U1.13 U1.17 U1.18 U1.20 U1.21 U1.22 U1.25 U1.26 U1.30 VT1_DRV1. VT1_DRV2. VT1_DRV3. VT1_DRV4. VT1_DRV5. VT1_DRV6. VT1_DRV7. VT1_DRV8. VT1_DRV9. VT1_DRV10. VT1_DRV11. VT1_DRV12. VT1_DRV13. VT1_DRV14. VT1_DRV15. VT1_DRV16. VT1_DRV17. VT1_DRV18.

## Polygon pours and split planes (outlines as drawn)
GND on Top Layer "GND_TOP" (solid, remove dead copper, shelved, pour order 0): 4,0 0,4 0,76 4,80 146,80 150,76 150,4 146,0
GND on Bottom Layer "GND_BOTTOM" (solid, remove dead copper, shelved, pour order 1): 4,0 0,4 0,76 4,80 146,80 150,76 150,4 146,0

## Keep-outs
Keep-Out Layer:
  the board outline again, w0.254